# EAGLE board Power_Meter_v1.0 (EAGLE 9.1.0)
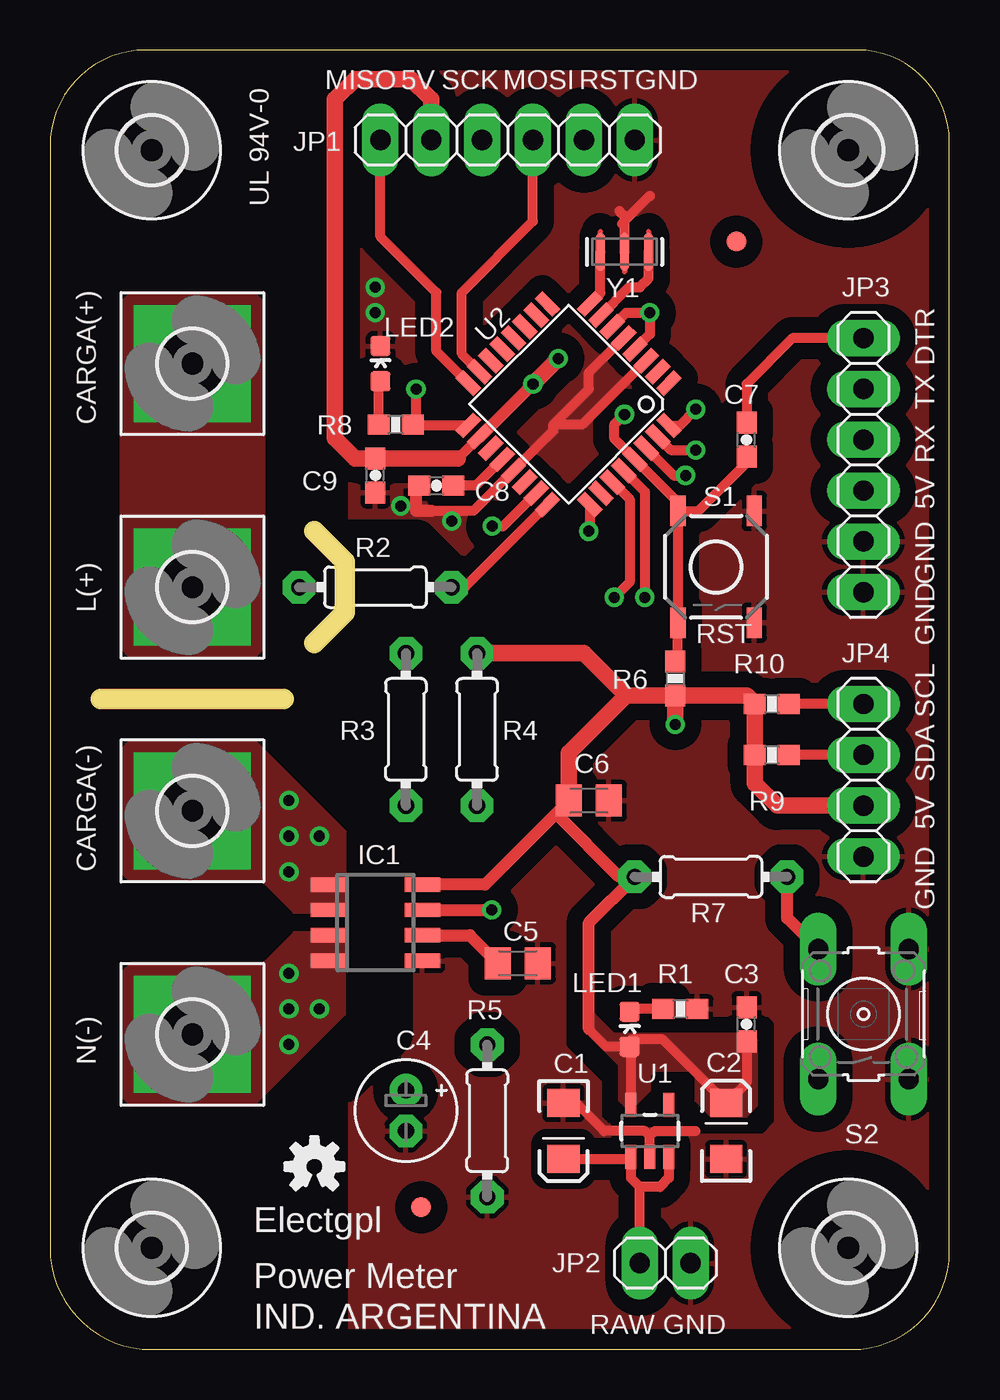
[diagram p0: board, top side]
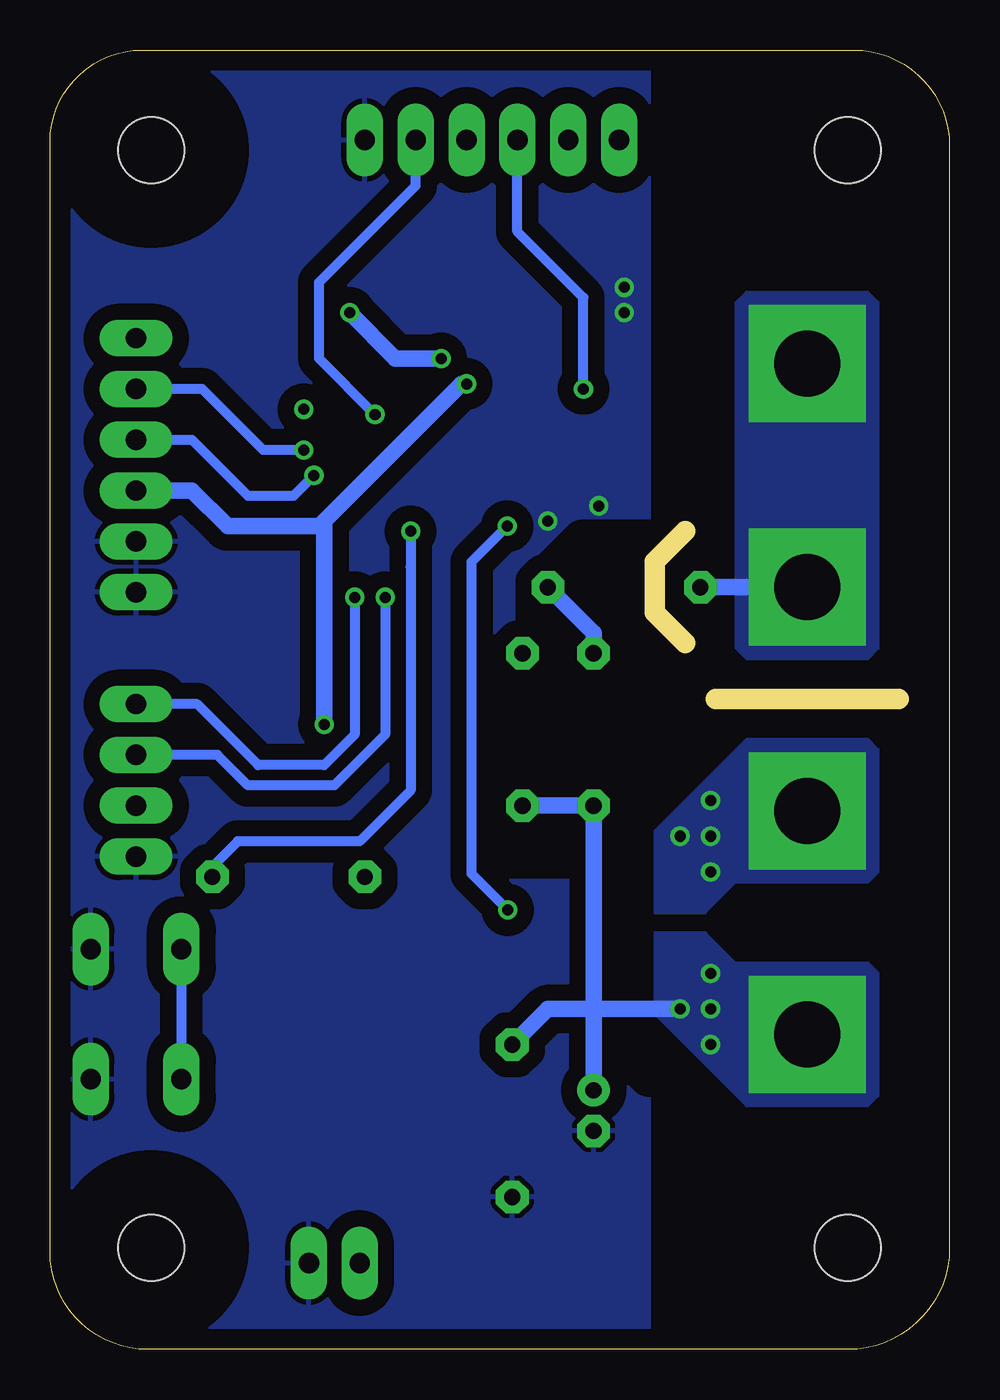
[diagram p1: board, bottom side, seen from below]

Size 44.94 x 64.95 mm. Coordinates in mm from the lower left corner, seen from the top.
Outline: 0,60.17 0,5.08 arc90 5.08,0 40.05,0 arc90 44.94,4.89 44.94,60.35 arc90 40.34,64.95 4.78,64.95 arc90 0,60.17
Copper layers (1*16): Top 0.035mm / dielectric 1.5mm / Bottom 0.035mm
Design rules "default *": minimum track width 6mil, minimum drill 0.35mm, track to track 6mil, track to pad 6mil, pad to pad 6mil, via to via 6mil, smd to smd 6mil, copper to edge 40mil, drill to drill 6mil, minimum pad ring 16mil, minimum via ring 8mil, stop-mask expansion 4mil, vias tented up to drill 0mil, thermal gap 10mil
Net classes: 0 default: width 0.203 mm; 1 vcc: width 0.254 mm
tRestrict: area 14.7,13.5 to 23.1,29.7; area 14.7,30.7 to 20.6,40.4
bRestrict: area 14.7,13.7 to 23.1,29.7; area 14.7,30.7 to 20.6,40.4
Milling: 4 lines

## Footprints (pad centres in the part's own frame; a part is rotated, then mirrored left to right if it is on the bottom)
EIA3216 = smd 1.4 x 1.6: A 1.4,0; C -1.4,0
0603-CAP = smd 1.1 x 1: 1 -0.85,0; 2 0.85,0
E2-5 = drill 0.813 pad 1.27: + -1.016,0 | drill 0.813 pad 1.27 octagon: - 1.016,0
C0805K = smd 1.3 x 1.6: 1 -1,0; 2 1,0
3,3-PAD-SQUARE = drill 3.3 pad 5.842 square: B3,3 0,0
SO08 = smd 0.72 x 1.78: 1 -1.905,-2.35; 2 -0.635,-2.35; 3 0.635,-2.35; 4 1.905,-2.35; 5 1.905,2.35; 6 0.635,2.35; 7 -0.635,2.35; 8 -1.905,2.35
1X06 = drill 1.016 long: 1 -6.35,0; 2 -3.81,0; 3 -1.27,0; 4 1.27,0; 5 3.81,0; 6 6.35,0
1X02 = drill 1.016 long: 1 -1.27,0; 2 1.27,0
1X04 = drill 1.016 long: 1 -3.81,0; 2 -1.27,0; 3 1.27,0; 4 3.81,0
FIDUCIAL-1X2.5 = smd 1 x 1: 1 0,0
0603-LED-ALT1 = smd 1 x 1: A 0,-0.877; C 0,0.877
0603-RES = smd 1.1 x 1: 1 -0.85,0; 2 0.85,0
0204/7 = drill 0.813 octagon: 1 -3.81,0; 2 3.81,0
TACTILE-SWITCH-SMD-ALT01 = smd 1.524 x 0.762: 1 -2.794,1.905; 2 2.794,1.905; 3 -2.794,-1.905; 4 2.794,-1.905
B3F-10XX = drill 1.016 long: 1 -3.251,2.261; 2 3.251,2.261; 3 -3.251,-2.261; 4 3.251,-2.261
SOT23-5 = smd 0.55 x 1.2: 1 -0.95,-1.3; 2 0,-1.3; 3 0.95,-1.3; 4 0.95,1.3; 5 -0.95,1.3
TQFP32-08 = smd 1.27 x 0.559: 1 -4.293,2.8; 2 -4.293,2; 3 -4.293,1.2; 4 -4.293,0.4; 5 -4.293,-0.4; 6 -4.293,-1.2; 7 -4.293,-2; 8 -4.293,-2.8; 17 4.293,-2.8; 18 4.293,-2; 19 4.293,-1.2; 20 4.293,-0.4; 21 4.293,0.4; 22 4.293,1.2; 23 4.293,2; 24 4.293,2.8 | smd 0.559 x 1.27: 9 -2.8,-4.293; 10 -2,-4.293; 11 -1.2,-4.293; 12 -0.4,-4.293; 13 0.4,-4.293; 14 1.2,-4.293; 15 2,-4.293; 16 2.8,-4.293; 25 2.8,4.293; 26 2,4.293; 27 1.2,4.293; 28 0.4,4.293; 29 -0.4,4.293; 30 -1.2,4.293; 31 -2,4.293; 32 -2.8,4.293
3,3 = hole 3.3: 0,0
RESONATOR-SMD-1:1 = smd 0.45 x 1.905: 1 -1.2,0; 2 0,0; 3 1.2,0

## Placement (x,y rotation side)
C1  10uF  [EIA3216]  25.65,10.92 270 top
C2  10uF  [EIA3216]  33.78,10.92 90 top
C3  0.1uF  [0603-CAP]  34.8,16.26 90 top
C4  1u  [E2-5]  17.78,11.94 270 top
C5  1n  [C0805K]  23.37,19.3 0 top
C6  100n  [C0805K]  26.92,27.43 0 top
C7  0.1uF  [0603-CAP]  34.8,45.47 90 top
C8  0.1uF  [0603-CAP]  19.3,43.18 0 top
C9  0.1uF  [0603-CAP]  16.26,43.69 90 top
H1  MOUNT-PAD-SQUARE3.3  [3,3-PAD-SQUARE]  7.11,49.28 0 top
H2  MOUNT-PAD-SQUARE3.3  [3,3-PAD-SQUARE]  7.11,26.92 0 top
H3  MOUNT-PAD-SQUARE3.3  [3,3-PAD-SQUARE]  7.11,38.1 0 top
H4  MOUNT-PAD-SQUARE3.3  [3,3-PAD-SQUARE]  7.11,15.75 0 top
IC1  ACS712  [SO08]  16.26,21.34 270 top
JP1  [1X06]  22.86,60.45 0 top
JP2  [1X02]  30.73,4.32 0 top
JP3  [1X06]  40.64,44.2 270 top
JP4  [1X04]  40.64,28.45 270 top
JP5  FIDUCIAL1X2.5  [FIDUCIAL-1X2.5]  34.29,55.37 0 top
JP6  FIDUCIAL1X2.5  [FIDUCIAL-1X2.5]  18.54,7.11 0 top
LED1  Red  [0603-LED-ALT1]  28.96,16 0 top
LED2  Green  [0603-LED-ALT1]  16.51,49.28 0 top
R1  10K  [0603-RES]  31.5,17.02 180 top
R2  1M  [0204/7]  16.26,38.1 180 top
R3  10k  [0204/7]  17.78,30.99 90 top
R4  10k  [0204/7]  21.34,30.99 90 top
R5  10k  [0204/7]  21.84,11.43 90 top
R6  10K  [0603-RES]  31.24,33.53 270 top
R7  10k  [0204/7]  33.02,23.62 180 top
R8  330  [0603-RES]  17.27,46.23 180 top
R9  [0603-RES]  36.07,29.72 180 top
R10  [0603-RES]  36.07,32.26 180 top
S1  Reset  [TACTILE-SWITCH-SMD-ALT01]  33.27,39.12 270 top
S2  [B3F-10XX]  40.64,16.76 90 top
U1  MIC5205  [SOT23-5]  29.97,10.92 0 top
U2  ATMEGA328  [TQFP32-08]  25.91,47.24 225 top
U$1  [3,3]  5.08,5.08 0 top
U$2  [3,3]  5.08,59.94 0 top
U$3  [3,3]  39.88,59.94 0 top
U$4  [3,3]  39.88,5.08 0 top
U$5  OSHW-LOGOS  [OSHW-LOGO-S]  13.21,9.14 0 top
Y1  8/16/20MHz  [RESONATOR-SMD-1:1]  28.7,54.86 180 top

## Library data of the parts
C1-C3 C7-C9 JP5 JP6 R1 R6 R8-R10 U1 U2 = SparkFun
C4-C6 = rcl; SPICEPREFIX: C
H1-H4 U$1-U$4 = holes
IC1 = ACS712
JP1-JP4 = pinhead
LED1 LED2 S1 Y1 = Testing
R2-R5 R7 = rcl; SPICEPREFIX: R
S2 = switch-omron; MPN: B3F-1000; OC_FARNELL: 176432; OC_NEWARK: 36M3542
U$5 = SparkFun-Aesthetics

## Nets
A0: IC1.7 U2.23
A1: R2.1 R3.2 U2.24
A2: R7.1 S2.1 S2.2 U2.25
A3: U2.26
A6: U2.19
A7: U2.22
AREF: C8.2 U2.20
D2: U2.32
D3: U2.1
D4: U2.2
D5: U2.9
D6: U2.10
D7: U2.11
D8: U2.12
D9: U2.13
D10: U2.14
DTR: C7.2 JP3.1
GND: C1.C C2.C C3.2 C4.- C5.2 C6.2 C8.1 C9.1 IC1.5 JP1.6 JP2.2 JP3.5 JP3.6 JP4.4 LED2.C R1.1 R5.1 S1.1 S1.2 S2.3 S2.4 U1.2 U2.3 U2.5 U2.21 Y1.2
MISO: JP1.1 U2.16
MOSI: JP1.4 U2.15
N$1: LED2.A R8.2
N$2: U2.8 Y1.3
N$3: U2.7 Y1.1
N$6: H1.B3,3 H3.B3,3 R2.2
N$7: C5.1 IC1.6
N$8: H2.B3,3 IC1.1 IC1.2
N$9: LED1.C R1.2
N$10: C4.+ H4.B3,3 IC1.3 IC1.4 R3.1 R4.1 R5.2
RAW [vcc]: C1.A JP2.1 U1.1 U1.3
RESET: C7.1 JP1.5 R6.1 S1.3 S1.4 U2.29
RXI: JP3.3 U2.30
SCK: JP1.3 R8.1 U2.17
SCL: JP4.1 R10.1 U2.28
SDA: JP4.2 R9.1 U2.27
TXO: JP3.2 U2.31
VCC: C2.A C3.1 C6.1 C9.2 IC1.8 JP1.2 JP3.4 JP4.3 LED1.A R4.2 R6.2 R7.2 R9.2 R10.2 U1.5 U2.4 U2.6 U2.18

## Tracks (layer width: path | path; a pad name or v marks a point on that pad's centre or on a via)
A0  (via drill 0.55)
  Top 0.508: v22.1,41.15 22.64,41.15 U2.23
  Top 0.61: IC1.7 v22.07,21.97
  Bottom 0.508: v22.07,21.97 23.88,23.78 23.88,39.37 v22.1,41.15
A1
  Top 0.508: R2.1 20.72,38.1 U2.24
  Bottom 0.813: R3.2 17.78,35.81 R2.1
A2  (via drill 0.55)
  Top 0.508: U2.25 26.96,40.93
  Top 0.61: S2.2 36.83,21.57 R7.1 | 26.96,40.93 v26.92,40.89
  Bottom 0.508: v26.92,40.89 26.92,39.12 26.92,27.94 29.46,25.4 35.56,25.4 36.83,24.13 | S2.2 S2.1
  Bottom 0.61: 36.83,24.13 R7.1
AREF
  Top 0.508: U2.20 21.28,43.18 C8.2
D2  (via drill 0.55)
  Top 0.508: U2.32 31.46,46.19 v32.26,46.99
DTR
  Top 0.508: JP3.1 37.08,50.55 34.8,48.26 C7.2
GND  (via drill 0.55)
  Top 0.508: U1.2 29.97,10.67 | 29.97,10.67 29.72,10.92 27.69,10.92 26.29,12.32 C1.C | 29.97,10.67 30.23,10.92 32.26,10.92 | 28.45,56.9 28.7,56.64 28.7,56.13 | 19.05,41.91 21.14,41.91 U2.21 25.15,45.92 25.15,46.23 | U2.5 26.92,48.83 | 26.92,48.83 26.92,48.77 | U2.3 26.59,46.23 25.15,46.23 | 25.15,46.23 26.92,48.01 26.92,48.83 | Y1.2 28.7,56.13 | 28.7,56.13 28.57,56.26 29.97,57.66
  Top 0.61: 19.05,41.91 18.29,41.91 18.29,43.01 C8.1
  other vias: 16.26,53.09 16.26,51.82 20.07,41.4 17.53,42.16
  pour Bottom (isolate 0.813, rank 6): 14.99,66.29 48.01,66.29 48.01,-2.79 14.99,-2.79
  pour Top (isolate 0.813, rank 6): 14.99,69.34 51.31,69.34 51.31,-1.02 14.99,-1.02
MISO
  Top 0.508: U2.16 19.3,49.89 19.3,52.83 16.51,55.63 JP1.1
MOSI
  Top 0.508: U2.15 20.57,49.75 20.57,52.83 24.13,56.39 JP1.4
N$1
  Top 0.508: R8.2 16.42,48.31 LED2.A
N$2
  Top 0.508: U2.8 27.5,52.8 Y1.3
N$3
  Top 0.508: U2.7 28.92,53.09 29.46,53.09 29.9,53.52 Y1.1
N$6
  Bottom 0.813: R2.2 H3.B3,3
  pour Top (no thermals): 4.06,34.54 3.56,35.05 3.56,52.32 4.06,52.83 10.16,52.83 10.67,52.32 10.67,35.05 10.16,34.54
  pour Bottom (no thermals): 4.06,34.54 3.56,35.05 3.56,52.32 4.06,52.83 10.16,52.83 10.67,52.32 10.67,35.05 10.16,34.54
N$7
  Top 0.61: IC1.6 20.97,20.7 C5.1
N$8  (via drill 0.55)
  other vias: 13.46,25.65 11.94,23.88 11.94,25.65 11.94,27.43
  pour Top (no thermals): 3.56,29.97 4.06,30.48 10.16,30.48 14.73,25.91 14.73,21.84 12.19,21.84 10.67,23.37 4.06,23.37 3.56,23.88
  pour Bottom (no thermals): 4.06,23.37 3.56,23.88 3.56,29.97 4.06,30.48 10.16,30.48 14.73,25.91 14.73,21.84 12.19,21.84 10.67,23.37
N$9
  Top 0.508: R1.2 29.09,17.02 LED1.C
N$10  (via drill 0.55)
  Top 0.61: R5.2 22.1,15.24
  Bottom 0.813: R4.1 R3.1 17.78,17.02 | v13.46,17.02 16.51,17.02 17.78,17.02 | 17.78,17.02 20.07,17.02 R5.2 | C4.+ 17.78,17.02
  other vias: 11.94,18.8 11.94,17.02 11.94,15.24
  pour Top (no thermals): 14.73,20.83 12.19,20.83 10.67,19.3 4.06,19.3 3.56,18.8 3.56,12.7 4.06,12.19 10.16,12.19 14.73,16.76
  pour Bottom (no thermals): 3.56,18.8 4.06,19.3 10.67,19.3 12.19,20.83 14.73,20.83 14.73,16.76 10.16,12.19 4.06,12.19 3.56,12.7
RAW
  Top 0.508: C1.A 28.92,9.52 U1.1 29.02,8.57 29.46,8.13 | U1.3 30.92,8.57 30.48,8.13 29.46,8.13 | JP2.1 29.46,8.13
RESET  (via drill 0.55)
  Top 0.508: S1.3 31.37,42.35 U2.29 28.19,45.52 28.19,46.23 v28.7,46.74 | S1.3 S1.4 31.37,34.51 R6.1 | S1.3 32.38,41.91 34.8,44.32 C7.1
  Bottom 0.508: v28.7,46.74 31.5,49.53 31.5,53.34 26.67,58.17 JP1.5
RXI  (via drill 0.55)
  Top 0.508: U2.30 31.16,43.69 v31.75,43.69
  Bottom 0.508: JP3.3 37.85,45.47 35.05,42.67 32.77,42.67 v31.75,43.69
SCK  (via drill 0.55)
  Top 0.508: U2.17 18.16,46.19 R8.1 18.29,46.39 v18.29,48.01
  Bottom 0.508: v18.29,48.01 18.29,52.58 21.59,55.88 JP1.3
SCL  (via drill 0.55)
  Top 0.508: JP4.1 R10.1 | U2.28 29.72,42.87 v29.72,37.59
  Bottom 0.508: v29.72,37.59 29.72,30.73 31.24,29.21 34.54,29.21 37.59,32.26 JP4.1
SDA  (via drill 0.55)
  Top 0.508: JP4.2 R9.1 | U2.27 28.96,42.5 28.96,38.35 v28.19,37.59
  Bottom 0.508: v28.19,37.59 28.19,30.73 30.73,28.19 35.05,28.19 36.58,29.72 JP4.2
TXO  (via drill 0.55)
  Top 0.508: U2.31 31.02,44.96 v32.26,44.96
  Bottom 0.508: v32.26,44.96 34.29,44.96 37.34,48.01 JP3.2
VCC  (via drill 0.55)
  Top 0.508: U2.6 28.78,51.82 v29.97,51.82 29.97,50.74 U2.4 | 21.49,45.62 U2.18 20.37,44.54 | U1.5 29.02,15.12 LED1.A 27.8,15.12 26.92,16 | 29.02,15.46 29.05,15.49 30.61,15.49 C2.A 34.8,13.34 C3.1
  Top 0.61: v24.13,48.26 21.49,45.62 | 26.92,16 26.92,21.34 R7.2 28.45,23.62 25.28,26.79 | C6.1 25.28,26.79 | 25.28,26.79 21.73,23.24 IC1.8
  Top 0.813: v25.4,49.53 v24.13,48.26 | R6.2 34.8,32.68 R10.2 R9.2 35.22,28.28 36.32,27.18 JP4.3 | 20.37,44.54 C9.2 15.24,44.54 14.22,45.55 14.22,62.48 15.24,63.5 18.03,63.5 19.05,62.48 JP1.2 | v31.24,31.24 R6.2 | R4.2 26.67,34.8 28.79,32.68 | 28.79,32.68 R6.2 | C6.1 25.92,29.81 28.79,32.68
  Bottom 0.508: 31.24,31.5 v31.24,31.24 | v24.13,48.26 24.38,48.26 | 31.5,41.15 31.24,41.15
  Bottom 0.813: v29.97,51.82 27.69,49.53 v25.4,49.53 | 24.38,48.26 31.5,41.15 36.07,41.15 37.85,42.93 JP3.4 | 31.24,41.15 31.24,31.5
  pour Top (no thermals): 29.21,12.19 29.97,12.95 29.97,13.72 30.23,13.97 30.48,13.97 32,13.97 32.26,13.72 32.26,12.45 33.02,11.68 34.8,11.68 35.31,12.19 35.31,15.49 35.05,15.75 29.21,15.75 28.19,15.75 26.8,17.14 26.67,17.02 26.67,16 28.45,14.22 28.45,12.45 28.7,12.19

## Text on the board
tNames: MISO | 5V | SCK | MOSI | RST | GND | UL 94V-0 | DTR | TX | CARGA(+) | RX | 5V | GND | GND | L(+) | RST | SCL | SDA | 5V | GND | CARGA(-) | N(-) | Electgpl | Power Meter | RAW | GND | IND. ARGENTINA